# Altium PCB LNA.PcbDoc (part 2 of 2)
Units mm, origin at the board's own origin, x right, y up, seen from the top; angles counter-clockwise.
Board outline 50 x 50 mm, 4 copper layers (Top Layer, Layer 2, Layer 3, Bottom Layer), stack 1.513 mm thick; 84 components, 40 nets, 185 pads, 185 vias.
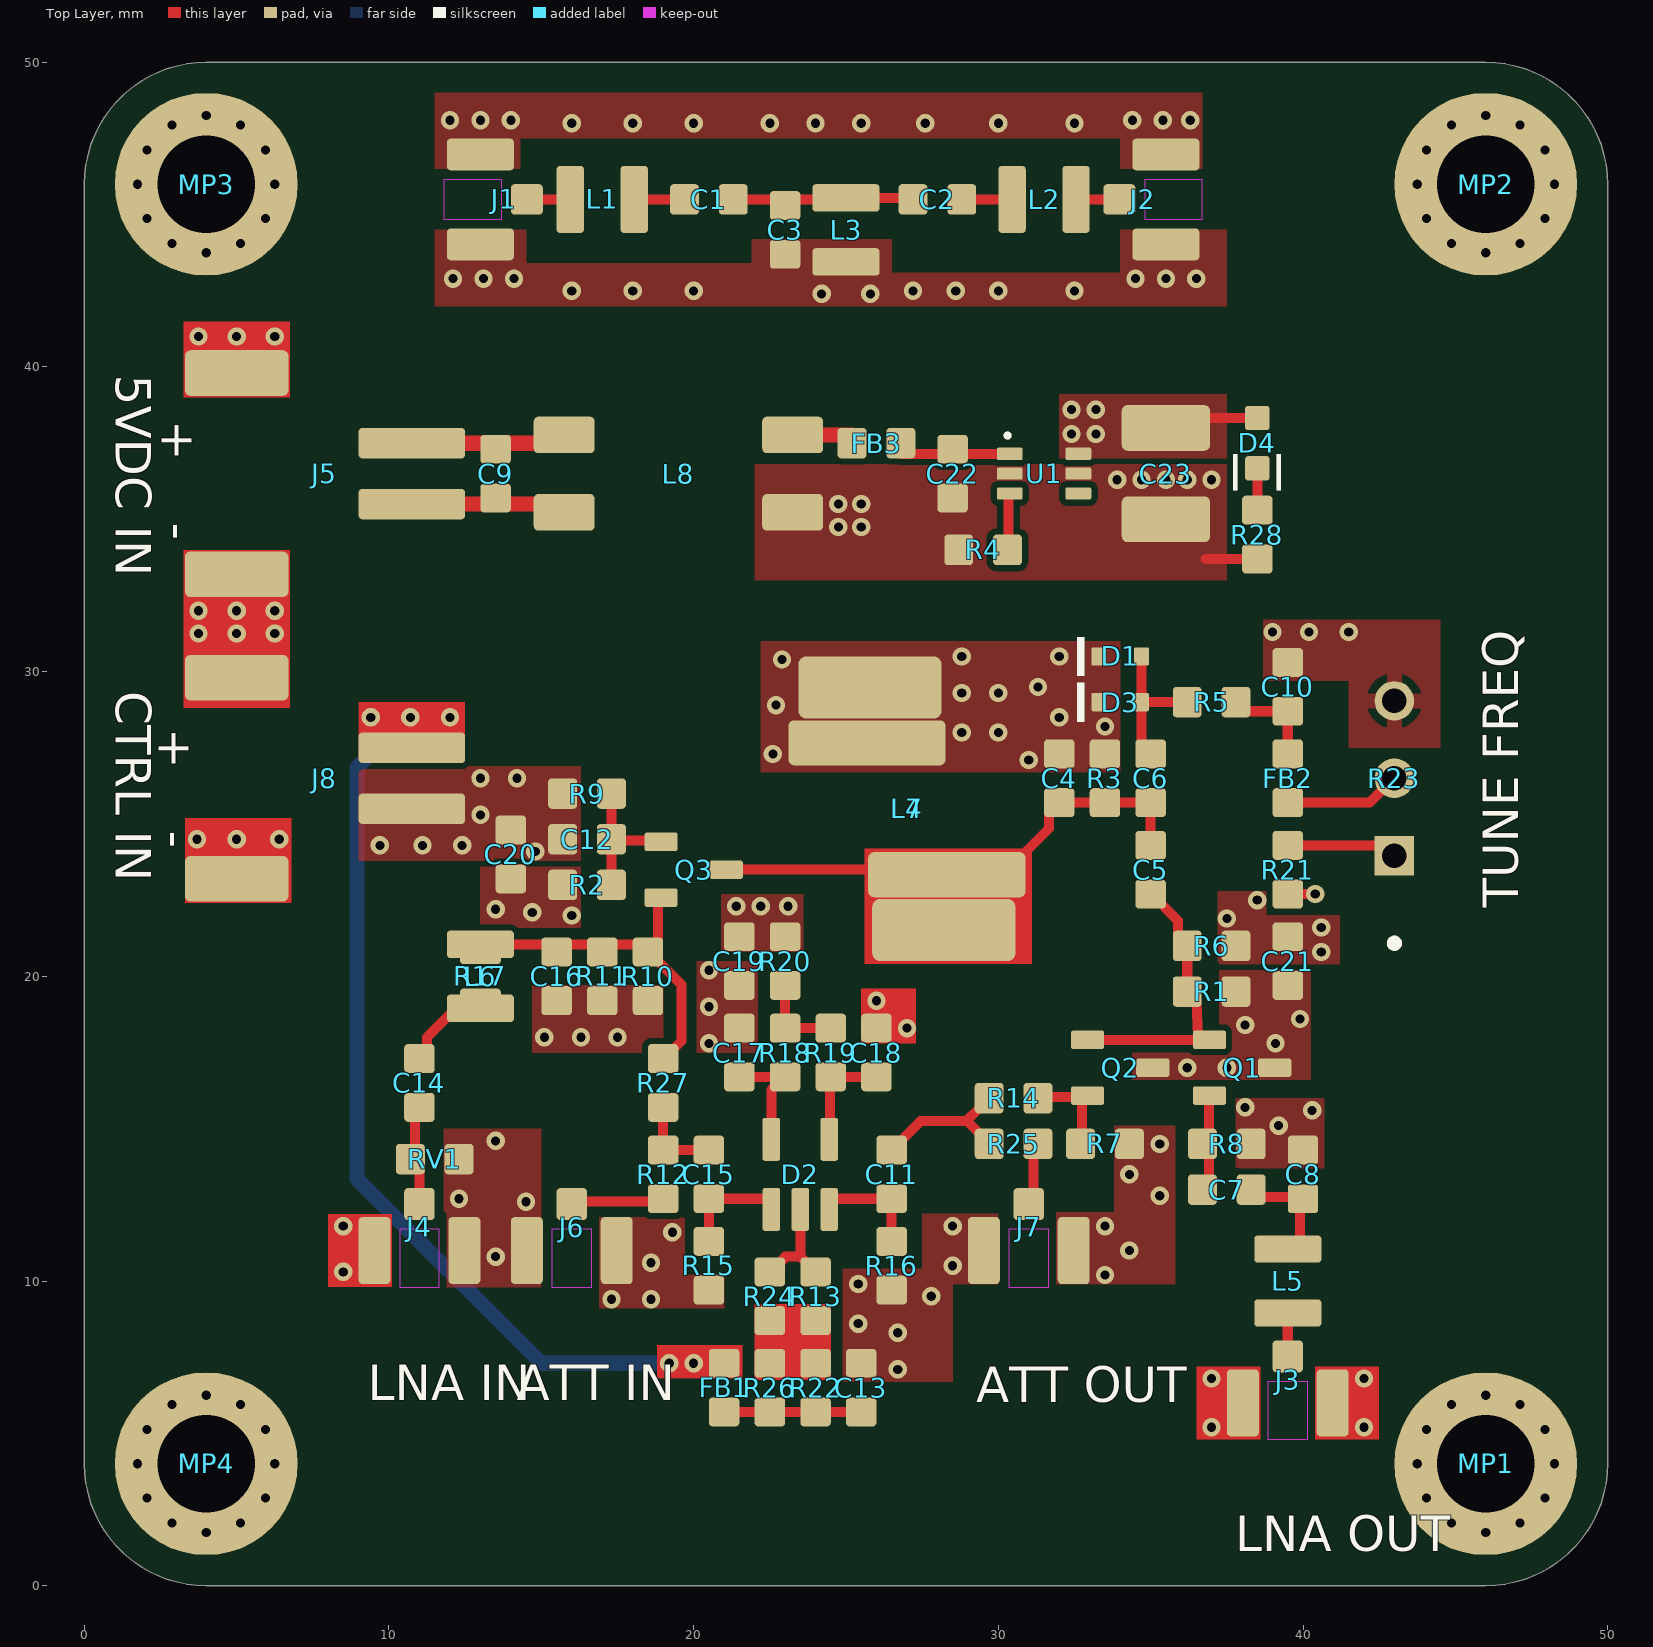
[diagram p0: Top Layer view]

## Silkscreen, mask and mechanical layers (free items; w line width, h text height) (continued)
Bottom Overlay: (continued)
  text ".board_name / .board_revision.-" at 35.103,1.635 h2.5
  text ".VersionControl_RevNumberShort" at 27.553,-2.025 h2.5
Board:
  the board outline again, w0.1
Fab Notes:
  drawing of 196 lines, arcs and shapes, not listed
  text "Layer" at 61.917,87.03 h2
  text "Name" at 70.338,87.03 h2
  text "Material" at 87,87.03 h2
  text "Thickness" at 98.216,87.03 h2
  text "Constant" at 109.509,87.03 h2
  text "Board Layer Stack" at 120.862,87.03 h2
  text "Top Overlay" at 70.338,83.03 h2
  text "Top Solder" at 70.338,79.03 h2
  text "SM-001" at 87,79.03 h2
  text "0.025mm" at 98.216,79.03 h2
  text "4" at 109.509,79.03 h2
  text "1" at 61.917,75.03 h2
  text "Top Layer" at 70.338,75.03 h2
  text "CF-004" at 87,75.03 h2
  text "0.035mm" at 98.216,75.03 h2
  text "Dielectric 2" at 70.338,71.03 h2
  text "PP-022" at 87,71.03 h2
  text "0.208mm" at 98.216,71.03 h2
  text "4.5" at 109.509,71.03 h2
  text "2" at 61.917,67.03 h2
  text "Layer 2" at 70.338,67.03 h2
  text "CF-003" at 87,67.03 h2
  text "0.018mm" at 98.216,67.03 h2
  text "Dielectric 3" at 70.338,63.03 h2
  text "Core-042" at 87,63.03 h2
  text "0.991mm" at 98.216,63.03 h2
  text "4.6" at 109.509,63.03 h2
  text "3" at 61.917,59.03 h2
  text "Layer 3" at 70.338,59.03 h2
  text "CF-003" at 87,59.03 h2
  text "0.018mm" at 98.216,59.03 h2
  text "Dielectric 5" at 70.338,55.03 h2
  text "PP-022" at 87,55.03 h2
  text "0.208mm" at 98.216,55.03 h2
  text "4.5" at 109.509,55.03 h2
  text "4" at 61.917,51.03 h2
  text "Bottom Layer" at 70.338,51.03 h2
  text "CF-004" at 87,51.03 h2
  text "0.035mm" at 98.216,51.03 h2
  text "Bottom Solder" at 70.338,47.03 h2
  text "SM-001" at 87,47.03 h2
  text "0.025mm" at 98.216,47.03 h2
  text "4" at 109.509,47.03 h2
  text "Bottom Overlay" at 70.338,43.03 h2
  text "1. Layer count : .Layer_Count / 2. Dimensions : .Board_Width x .Board_Height / 3. PCB Thickness : .Total_Thickness / 4. PCB Color : green / 5. Silkscreen : white / 6. Material type : >=FR4-TG155 / 7. Surface finish : Pb-free HASL / 8. Gold thickness : 1U\" / 9. Outer copper weight : 1oz / 10. Inner copper weight : 0.5oz / 11. Impedance control : No / 12. Layer stackup : JLC04161H-7628 / 13. Via covering : Tented / 14. Minimum hole size : .Hole_Size_Min / 15. Board outline tolerance : +/- 0.2mm / 16. Mark on PCB : 2D bardcode & Number | Data Matrix Code | .board_name _ABCDE_0001 | 8x8mm / 17. Gold fingers : No / 18. Castellated holes : No / 19. Press-fit holes : No / 20. Edge plating : No / 21. Hole count : .Hole_Count / 22. SMD solder joints : .PadSMD_Count / 23. Through-hole solder joints : .PadThru_Count" at 60,0.531 h2